# Altium PCB PCB1_Drone.PcbDoc
Units mm, origin at the board's own origin, x right, y up, seen from the top; angles counter-clockwise.
Board outline 62.48 x 75.48 mm, 2 copper layers (Top Layer, Bottom Layer); 15 components, 11 nets, 54 pads, 11 vias.
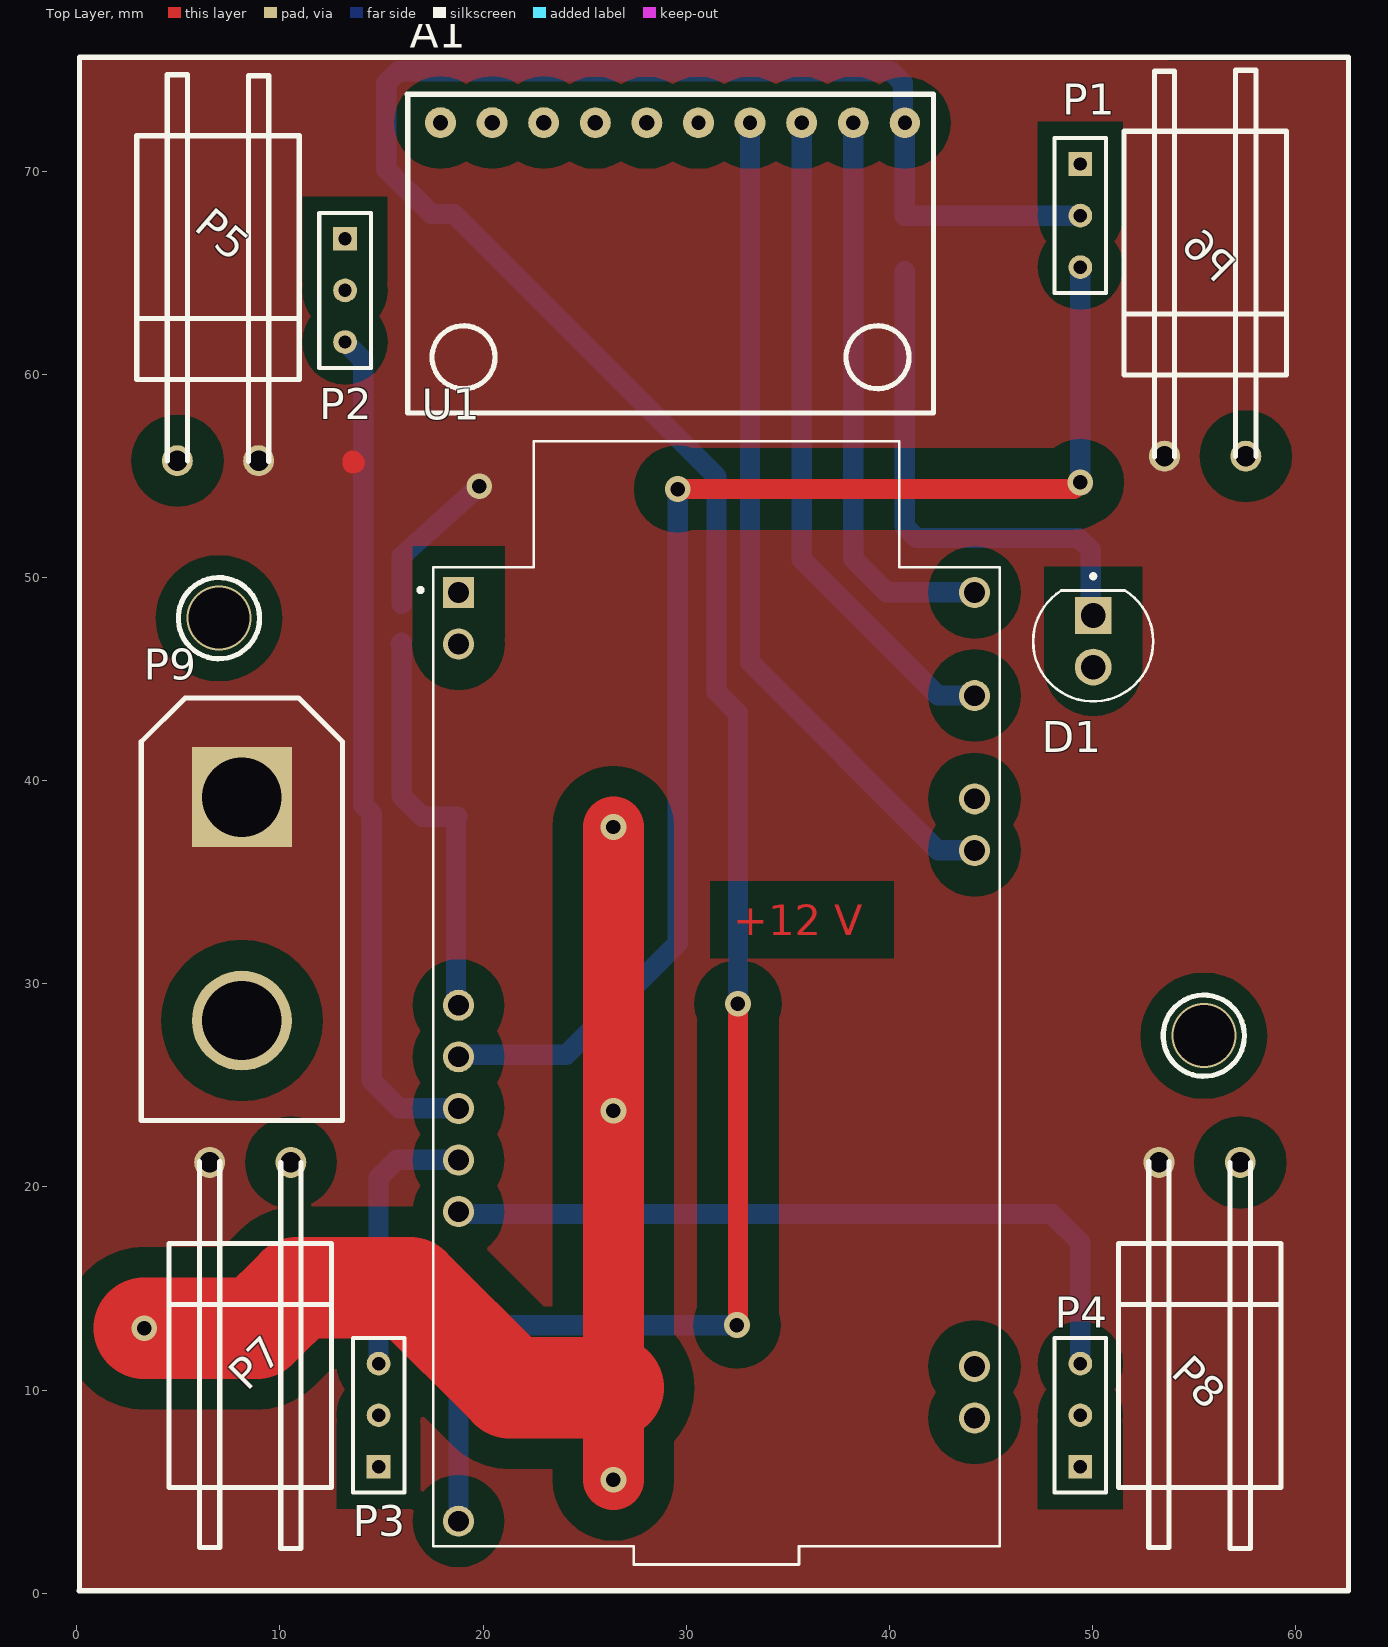
[diagram p0: Top Layer view]
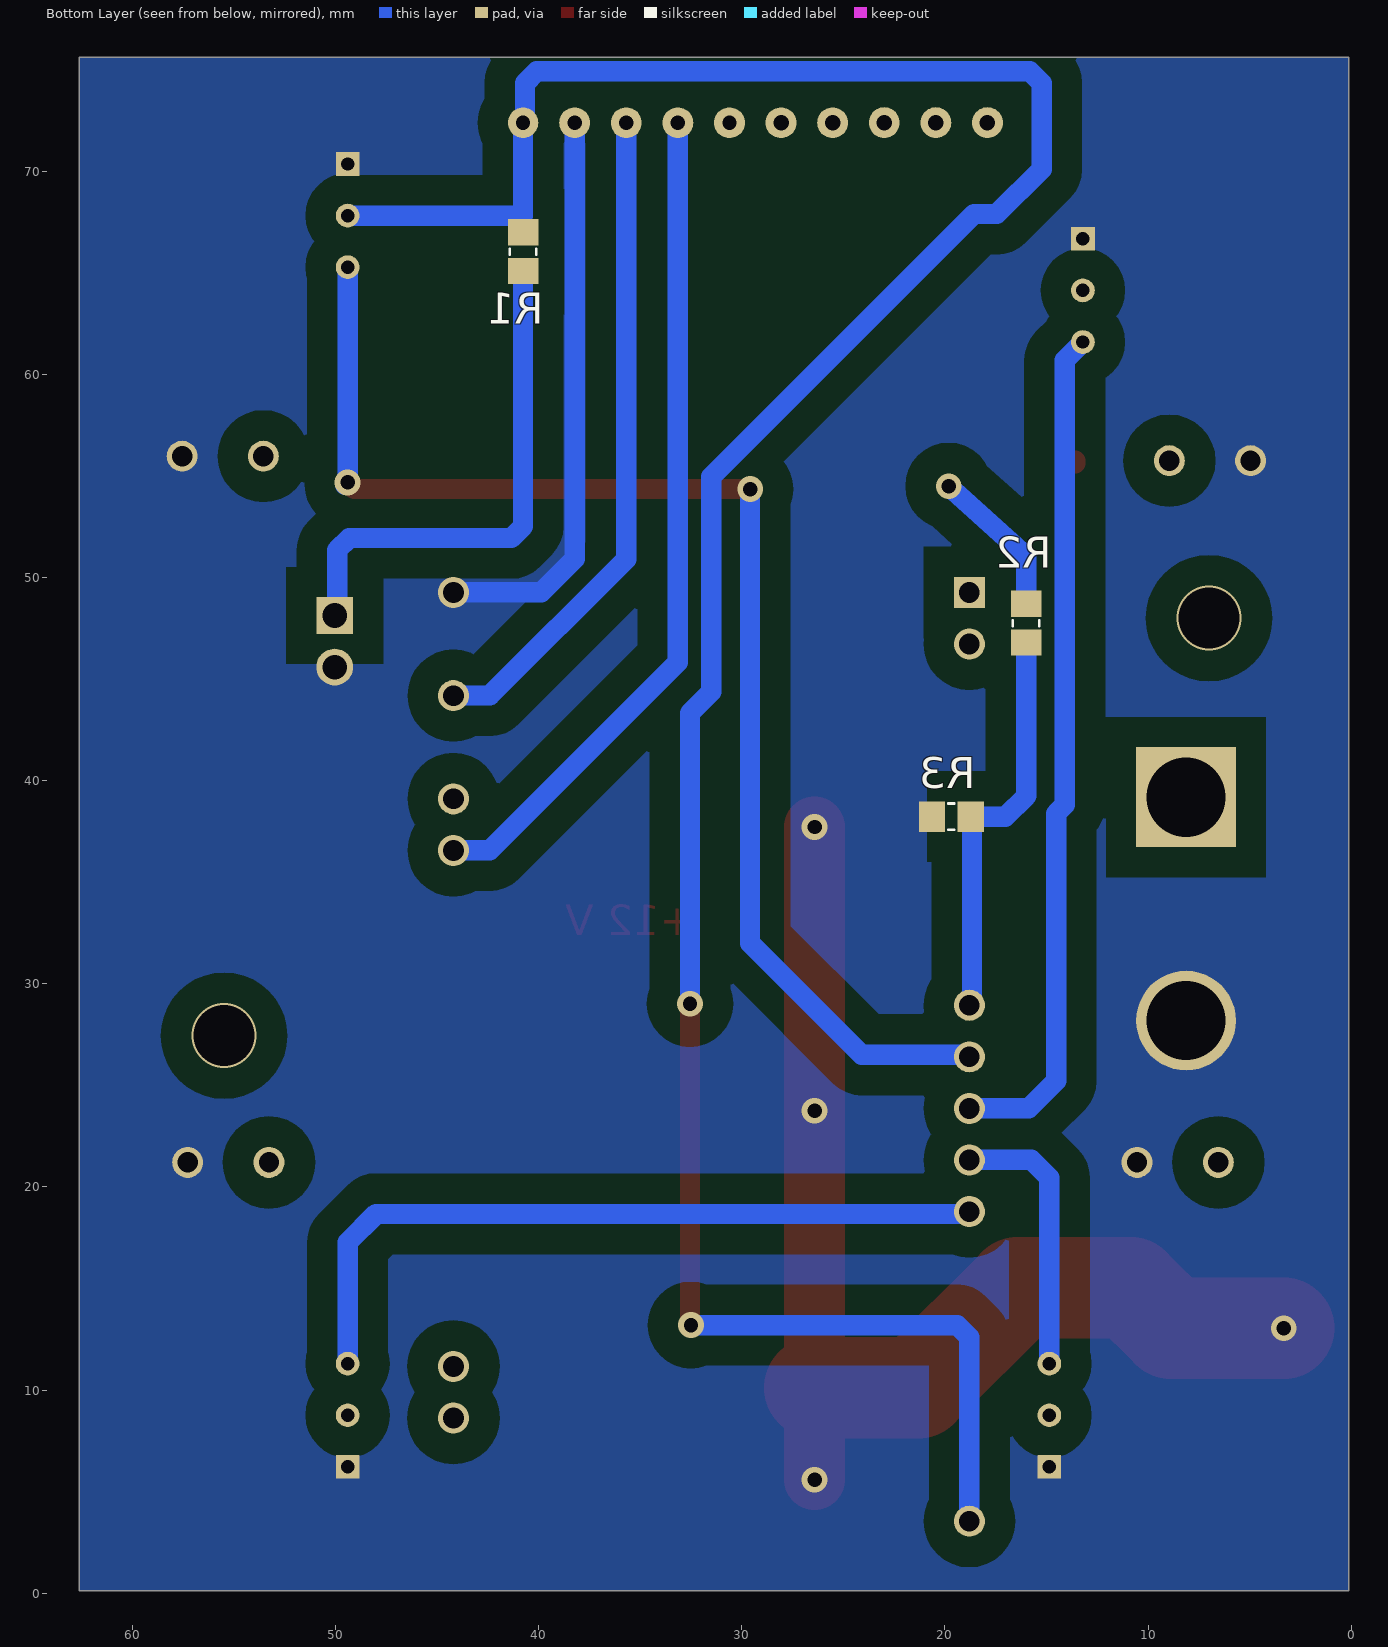
[diagram p1: Bottom Layer view, seen from below]

## Layer stack, top to bottom
Top Solder: solder mask 0.0102, Solder Resist, Dk 3.5
Top Layer: signal copper 0.0356
Dielectric 1: dielectric 0.32, FR-4, Dk 4.8
Bottom Layer: signal copper 0.0356
Bottom Solder: solder mask 0.0102, Solder Resist, Dk 3.5

## Board outline
0.127,0.127 62.607,0.127 62.61,0.129 62.61,75.606 62.605,75.611 0.129,75.611

## Design rules (kind name [scope] priority, off if disabled: settings)
Clearance [All] p1: gap=0.65 ignorepadtopadclearanceinfootprint=TRUE except(1.5: Arc-Poly Track-Poly SMDPad-Poly THPad-Poly Via-Poly Fill-Poly Poly-Poly)
PlaneConnect [All] p1: planeconnectstyle=Direct reliefexpansion=0.508 reliefentries=4 reliefconductorwidth=0.254 reliefairgap=0.254
PolygonConnect [All] p1: connectstyle=Direct reliefconductorwidth=0.254 reliefentries=4 polygonreliefangle="90 Angle" airgapwidth=0.254
RoutingVias [All] p1: holewidth=0.711 width=1.27 viastyle="Through Hole" minholewidth=0.711 minwidth=1.27 maxholewidth=0.711 maxwidth=1.27
SolderMaskExpansion [All] p1: expansion=0.102 istentingtop=FALSE
Width [All] p1: maxlimit=5 minlimit=0.7 preferedwidth=1
29 further rules are at their usual default settings.

## Components (designator, comment, footprint, x,y, rotation, side; value= is the part's Value field where it differs from the comment)
A1 "HW123_Acelerator" HW123_ACELEROMETER 42.172,73.795 r270 top
D1 "LED1" LEDRD254W57D500H1070 50.038,46.864 r270 top
P1 "MHDR1X3" SAMTEC_BBS-102-X-X 49.403,69.089 r270 top
P2 "MHDR1X3" SAMTEC_BBS-102-X-X 13.208,65.405 r270 top
P3 "MHDR1X3" SAMTEC_BBS-102-X-X 14.859,7.494 r90 top
P4 "MHDR1X3" SAMTEC_BBS-102-X-X 49.403,7.494 r90 top
P5 "MHDR1X2" "Header1x2 90°" 4.953,55.753 r0 top
P6 "MHDR1X2" "Header1x2 90°" 57.55,55.975 r180 top
P7 "MHDR1X2" "Header1x2 90°" 10.541,21.21 r180 top
P8 "MHDR1X2" "Header1x2 90°" 57.277,21.21 r180 top
P9 "MHDR1X2" AMASS_XT90PW-M 3.178,44.074 r0 top
R1 "Res1" CAPC2012X135N 40.767,66.041 r270 bottom value=1K
R2 "Res1" CAPC2012X135N 16.002,47.753 r270 bottom value=3K
R3 "Res1" CAPC2012X135N 19.685,38.228 r0 bottom value=1K
U1 "*" MODULE_ESP32-DEVKITC 31.496,26.417 r0 top

## Footprints (in the part's own frame and the unit in brackets; to place one, negate y for a bottom-side part, rotate by r counter-clockwise, add the part's x,y. Pads: shape width x height; smd on the part's side, far side on the other; paste and mask are expansions set on the pad)
AMASS_XT90PW-M [mm]
  rect 4.916x4.916 / inner round 4.916 / far side rect 4.916x4.916 hole 3.9: 1(4.95,-4.884)
  round 4.916 hole 3.9: 2(4.95,-15.88)
  silkscreen extent 0,-20.8 9.9,0
CAPC2012X135N [mm]
  rect 1.3x1.5 smd: 1(-0.95,0) 2(0.95,0)
  silkscreen extent -0.15,-0.65 0.15,0.65
"Header1x2 90°" [mil]
  round 60 hole 39.37: 1(0,0) 2(157.48,0)
  silkscreen extent -79,-2 236,748, body extent -80,160 235,630, height 10
HW123_ACELEROMETER [mm]
  round 1.5 hole 0.7: 1(1.405,-1.405)
  round 1.524 hole 0.7: 2(1.405,-3.945) 3(1.405,-6.485) 4(1.405,-9.025) 5(1.405,-11.565)
  round 1.524 hole 0.762: 6(1.405,-14.105) 7(1.405,-16.645) 8(1.4,-19.185) 9(1.4,-21.725) 10(1.4,-24.265)
  silkscreen extent 0,-25.91 15.7,0
LEDRD254W57D500H1070 [mm]
  rect 1.815x1.815 / inner round 1.815 / far side rect 1.815x1.815 hole 1.21: 1(-1.27,0)
  round 1.815 hole 1.21: 2(1.27,0)
  silkscreen extent -3.3,-2.96 2.96,2.96, body extent -2.6,-2.95 2.95,2.95, height 9.1
MODULE_ESP32-DEVKITC [mm]
  rect 1.53x1.53 hole 1.02: 1(-12.7,22.85)
  round 1.53 hole 1.02: 2(-12.7,20.31) 9(-12.7,2.53) 10(-12.7,-0.01) 11(-12.7,-2.55) 12(-12.7,-5.09) 13(-12.7,-7.63) 19(-12.7,-22.87) 22(12.7,-17.79) 23(12.7,-15.25) 33(12.7,10.15) 34(12.7,12.69) 36(12.7,17.77) 38(12.7,22.85)
  silkscreen extent -14.67,-25 13.95,30.3
SAMTEC_BBS-102-X-X [mm]
  rect 1.168x1.168 hole 0.66: 1(-1.27,0)
  round 1.168 hole 0.66: 2(1.27,0) 3(3.81,0)
  silkscreen extent -2.54,-1.27 5.08,1.27

## Part data
D1: "Typical RED GaAs LED", LatestRevisionDate=08-Jul-2005, LatestRevisionNote="Mech Layer 1 removed.", PackageDescription="LED; 2 Leads", PackageReference=LED-1, Published=8-Jun-2000, Publisher="Altium Limited"
P1 P2 P3 P4: "Header, 3-Pin", LatestRevisionDate=17-Jul-2002, LatestRevisionNote="Re-released for DXP Platform.", Publisher="Altium Limited"
P5 P6 P7 P8 P9: "Header, 2-Pin", LatestRevisionDate=17-Jul-2002, LatestRevisionNote="Re-released for DXP Platform.", Publisher="Altium Limited"
R1 R2 R3: "Resistor", LatestRevisionDate=17-Jul-2002, LatestRevisionNote="Re-released for DXP Platform.", PackageDescription="Axial Device, Thru-Hole; 2 Leads; 0.3 in Pin Spacing", PackageReference=AXIAL-0.3, Published=8-Jun-2000, Publisher="Altium Limited"
U1: library part ESP32-DEVKITC, "- Transceiver; 802.11 b/g/n _Wi-Fi, WiFi, WLAN_, BluetoothÂ® Smart Ready 4.x Dual Mode For Use With ESP-WROOM-32", Package=None, Availability=Unavailable, MF="Espressif Systems", MP=ESP32-DEVKITC-32D-F, Price=None, SnapEDA_Link=https://www.snapeda.com/parts/ESP32-DEVKITC-32D-F/Espressif%20Systems/view-part/4220172/?ref=snap

## Via types
v1: diameter 1.27, hole 0.711, Top Layer to Bottom Layer, 9 vias
v2: diameter 3.2, hole 3, Top Layer to Bottom Layer, 2 vias

## Nets (pads, with @x,y where several pads share a name; then routed paths per layer and width w, separated by ;. In a path a pad name is that pad's centre, name@x,y a point inside that pad or via, vN(x,y) a via of type N, cw(c..) or ccw(c..) an arc to the next point about the centre after c; other vN are vias at no path point)
+12: P5.2 P6.2 P7.2 P8.2 P9.1 R2.1 | length 7.8
  Top Layer w1: 13.589,55.612 13.589,55.754 13.69,55.654
  Bottom Layer w1: R2.1 16.002,51.055 v1(19.812,54.5)
A: P4.3 U1.13 | length 37.2
  Bottom Layer w1: U1.13 18.898,18.686 19.272,18.686 19.288,18.67 48.006,18.67 49.403,17.273 P4.3
B: P3.3 U1.12 | length 13.5
  Bottom Layer w1: P3.3 14.859,20.448 15.748,21.337 18.786,21.337 U1.12
C: P2.3 U1.11 | length 41.7
  Bottom Layer w1: P2.3 14.102,60.701 14.102,38.81 14.525,38.388 14.525,25.227 15.875,23.877 18.786,23.877 U1.11
D: P1.3 U1.10 | length 66.3
  Top Layer w1: v1(29.584,54.357) 49.076,54.357 v1(49.403,54.684)
  Bottom Layer w1: U1.10@18.796,26.264 19.041,26.508 24.095,26.508 29.591,32.005 29.591,54.35 v1(29.584,54.357) ; P1.3 v1(49.403,54.684) v1@49.53,54.557
GND: A1.2 D1.2 P1.1 P2.1 P3.1 P4.1 P5.1 P6.1 P7.1 P8.1 P9.2 R3.2 U1.38 | length 86.1
  Top Layer w3: v1(26.416,5.589) 26.416,10.125 v1(26.416,23.75) v1(26.416,37.72)
  Top Layer w5: v1(3.325,13.05) 8.871,13.05 10.859,15.038 16.406,15.038 21.319,10.125 26.416,10.125
  Bottom Layer w1: A1.2@38.227,72.264 38.227,50.928 39.878,49.277 44.186,49.277 U1.38 U1.38@44.206,49.277
NetA1_3: A1.3 U1.36 | length 32.6
  Bottom Layer w1: A1.3@35.687,72.264 35.687,50.907 42.397,44.197 44.186,44.197 U1.36
NetA1_4: A1.4 U1.33 | length 41.3
  Bottom Layer w1: A1.4@33.147,72.264 33.147,45.827 42.397,36.577 44.186,36.577 U1.33
NetD1_1: D1.1 R1.2 | length 25.5
  Bottom Layer w1: R1.2 40.767,52.53 41.353,51.944 49.325,51.944 49.911,51.358 49.911,48.261 D1.1
P25: R2.2 R3.1 U1.9 | length 20.2
  Bottom Layer w1: R2.2@15.939,46.739 R2.2 16.002,39.244 17.018,38.228 R3.1 18.669,38.162 18.669,29.449 18.695,29.423 18.695,29.048 U1.9
VCC: A1.1 P1.2 R1.1 U1.19 | length 133.1
  Top Layer w1: v1(32.5,13.2) 32.55,13.25 v1(32.55,29.025)
  Bottom Layer w1: U1.19 18.796,12.596 19.4,13.2 v1(32.5,13.2) ; v1(32.55,29.025) 32.55,43.325 31.497,44.378 31.497,54.968 18.565,67.9 17.444,67.9 15.24,70.104 15.24,74.344 15.826,74.93 40.086,74.93 40.672,74.344 40.672,72.36 40.767,72.264 40.767,67.819 P1.2
pads on no net: A1.5 A1.6 A1.7 A1.8 A1.9 A1.10 P2.2 P3.2 P4.2 U1.1 U1.2 U1.22 U1.23 U1.34
copper on no net:
  other v2: 55.484,27.447 7,48

## Polygon pours and split planes (outlines as drawn)
GND on Bottom Layer "GND_L02_P009" (solid, remove dead copper, pour order 9): 0.127,75.569 62.611,75.569 62.611,0.128 0.127,0.128
+12 on Top Layer "+12" (solid, pour order 4): 0.127,75.605 0.127,0.128 62.611,0.128 62.611,75.44

## Other copper
Top Layer:
  text "+12 V" at 32.325,32.4 h1.5

## Silkscreen, mask and mechanical layers (free items; w line width, h text height)
Top Overlay:
  circle w0.254: c7,48 r2
  circle w0.254: c55.484,27.447 r2
  lines w0.254: 0.127,0.127 0.129,0.129 0.129,75.611 62.605,75.611 62.61,75.606 62.61,0.129 62.607,0.127 0.127,0.127